# Altium PCB RPE_PCB.PcbDoc (part 2 of 2)
Units mm, origin at the board's own origin, x right, y up, seen from the top; angles counter-clockwise.
Board outline 86.99 x 60.07 mm, 4 copper layers (Top Layer, GND, Layer 2, Bottom Layer), stack 0.603 mm thick; 49 components, 31 nets, 149 pads, 32 vias.
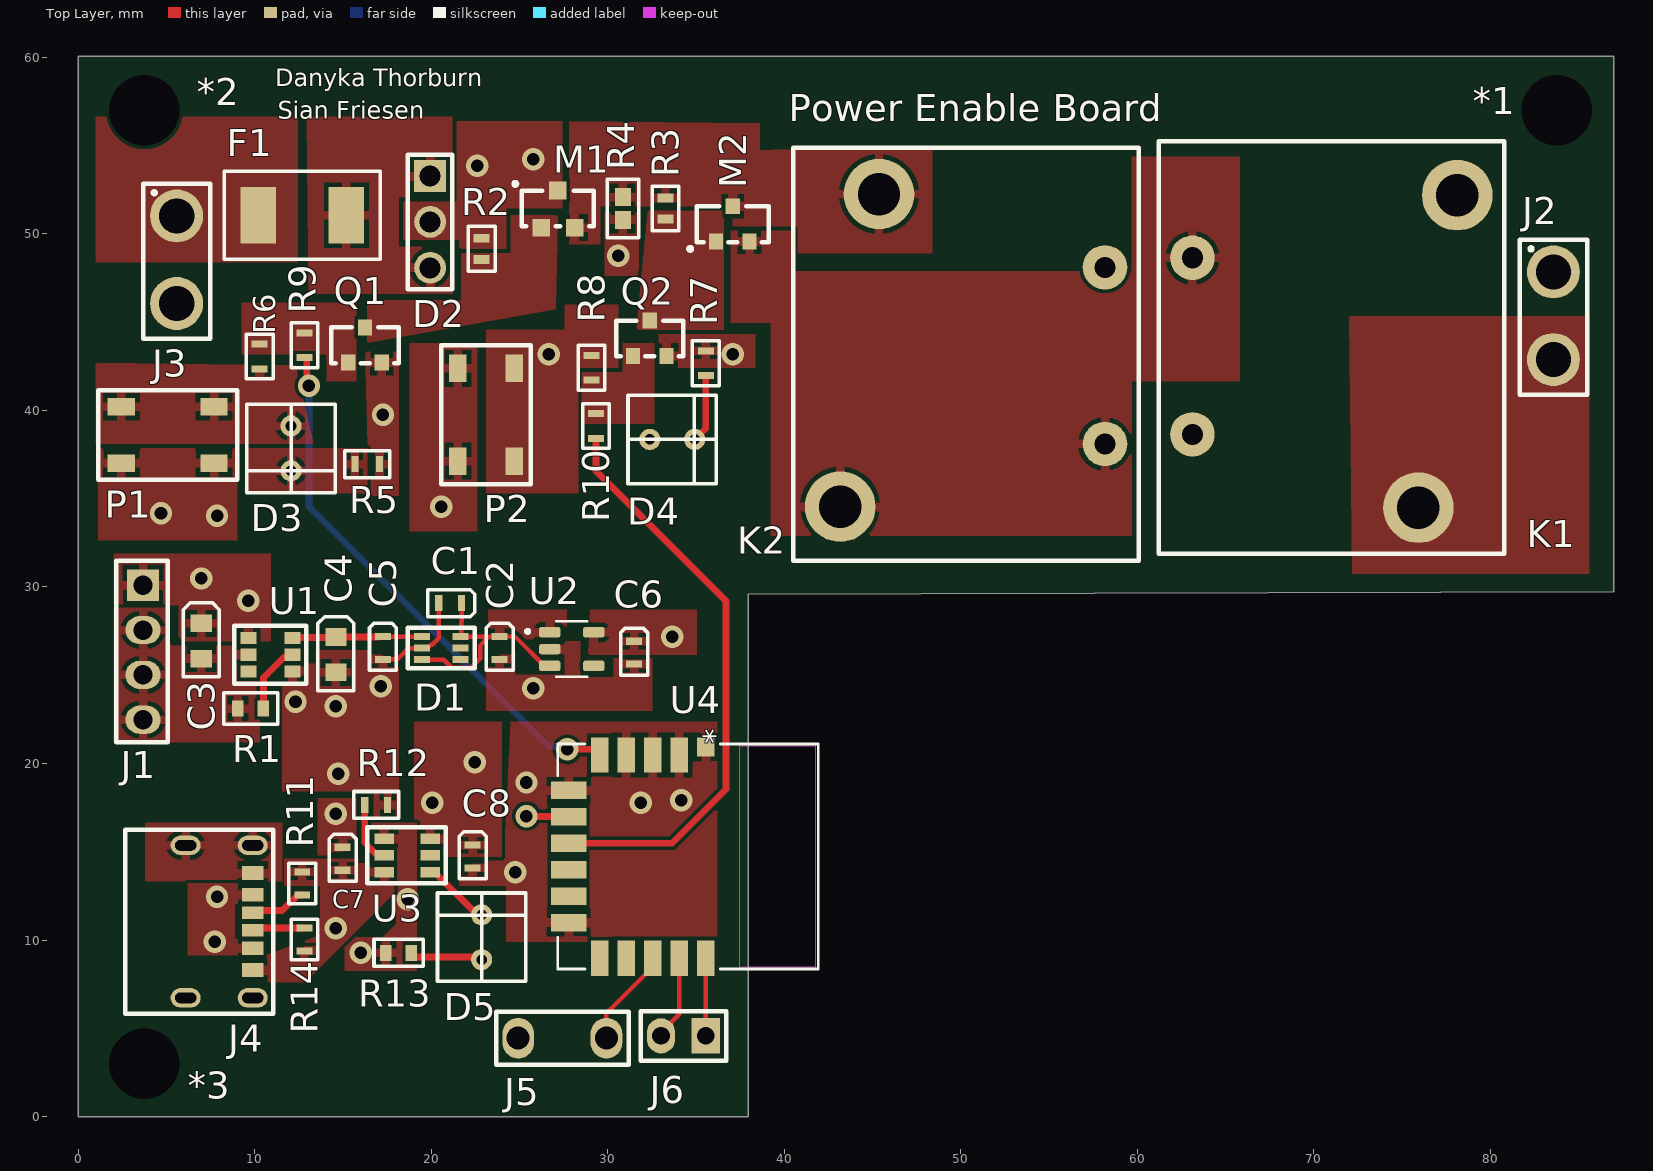
[diagram p0: Top Layer view]

## Via types
v1: diameter 1.27, hole 0.711, Top Layer to Bottom Layer, 32 vias

## Nets (pads, with @x,y where several pads share a name; then routed paths per layer and width w, separated by ;. In a path a pad name is that pad's centre, name@x,y a point inside that pad or via, vN(x,y) a via of type N, cw(c..) or ccw(c..) an arc to the next point about the centre after c; other vN are vias at no path point) (continued)
NetJ4_B5: J4.B5 R14.2 | length 2.9
  Top Layer w0.381: J4.B5@9.906,10.676 9.91,10.68 12.823,10.68 R14.2
NetJ5_1: J5.1 U4.J14 | length 5.6
  Top Layer w0.254: J5.1 29.932,5.86 32.545,8.473 U4.J14
NetJ6_1: J6.1 U4.J16 | length 4.4
  Top Layer w0.254: U4.J16 35.547,4.585 J6.1
NetJ6_2: J6.2 U4.J15 | length 5
  Top Layer w0.254: J6.2 33.02,4.772 34.046,5.798 U4.J15
  Top Layer w0.381: J6.2@32.898,4.694 J6.2
NetK1_3: K1.3 K2.1 K2.3 M2.S
NetK2_2: K2.2 M1.S M2.D R3.2 R4.2
NetM1_G: M1.G Q1.C R2.1
NetM2_G: M2.G Q2.C R3.1
NetQ1_B: Q1.B R6.2 R9.2
NetQ2_B: Q2.B R8.2 R10.2
NetR1_2: R1.2 U1.5 | length 3.9
  Top Layer w0.381: R1.2 10.504,24.855 11.651,26.002 11.992,26.002 U1.5
NetR9_1: R9.1 U4.J5 | length 30.9
  Top Layer w0.381: R9.1 12.945,42.988 12.954,42.979 12.954,41.529 v1(13.081,41.402) ; v1(27.71,20.803) 29.238,20.803 29.543,20.499 U4.J5
  Bottom Layer w0.381: v1(13.081,41.402) 13.081,34.54 26.645,20.977 27.128,20.977 27.131,20.974 27.54,20.974 v1(27.71,20.803)
NetR10_1: R10.1 U4.J8 | length 33.1
  Top Layer w0.381: U4.J8 33.644,15.483 36.703,18.542 36.703,29.21 29.337,36.576 R10.1
NetR12_2: R12.2 U3.4 | length 3.5
  Top Layer w0.381: R12.2 16.241,15.509 16.848,14.903 17.23,14.903 U3.4
pads on no net: *1.1 *2.1 *3.1 D1.4 D1.5 U1.3 U2.4 U3.1 U4.J9 U4.J10 U4.J12 U4.J13

## Polygon pours and split planes (outlines as drawn)
GND on Top Layer "GND_L01_P022" (solid, pour order 22): 11.557,25.654 13.462,25.654 13.462,26.416 18.161,26.416 18.161,23.241 11.557,23.241
+VBAT_3V7 on Top Layer "+VBAT_3V7_L01_P019" (solid, pour order 19): 2.032,31.877 10.922,31.877 10.922,26.924 5.969,26.924 5.715,27.178 5.715,28.956 2.159,28.956 2.032,29.083
GND on Top Layer "GND_L01_P018" (solid, pour order 18): 2.032,28.829 5.08,28.829 5.08,26.924 5.334,26.67 10.287,26.67 10.287,21.209 5.461,21.209 2.032,21.209
GND on Top Layer "GND_L01_P071" (solid, pour order 71): 29.845,51.181 31.75,51.181 31.75,47.752 31.623,47.625 29.845,47.625
NetK2_2 on Top Layer "NETK2_2_L01_P069" (solid, pour order 69): 27.813,56.381 27.813,51.562 34.671,51.562 38.608,51.562 38.608,56.261
GND on Top Layer "GND_L01_P075" (solid, pour order 75): 3.81,16.637 11.557,16.637 11.557,13.335 3.81,13.335
+5V on Top Layer "+5V_L01_P074" (solid, pour order 74): 6.223,13.208 10.922,13.208 10.922,12.065 8.89,12.065 8.89,10.033 10.541,10.033 10.541,9.144 6.223,9.144
GND on Top Layer "GND_L01_P013" (solid, pour order 13): 8.938,8.512 13.716,10.287 13.716,13.081 11.684,13.081 11.684,14.605 15.875,14.605 15.875,14.351 17.907,14.351 17.907,12.666 12.861,7.62 8.826,7.62
GND on Top Layer "GND_L01_P021" (solid, pour order 21): 24.511,22.352 36.195,22.352 36.195,9.906 24.257,9.906 24.257,13.081 21.59,13.081 21.59,14.478 24.13,14.478
GND on Top Layer "GND_L01_P073" (solid, pour order 73): 23.114,26.289 24.765,26.289 24.765,25.019 27.559,25.019 27.559,26.035 26.289,26.035 26.289,26.162 26.289,26.924 28.448,26.924 28.448,24.892 30.353,24.892 30.353,26.035 32.512,26.035 32.512,22.987 23.114,22.987
NetM2_G on Top Layer "NETM2_G_L01_P070" (solid, pour order 70): 32.258,51.308 36.576,51.308 36.576,44.577 31.623,44.577
NetK2_2 on Top Layer "NETK2_2_L01_P072" (solid, pour order 72): 27.813,51.562 27.813,49.403 29.591,49.403 29.591,51.562
GND on Top Layer "GND_L01_P066" (solid, pour order 66): 32.893,44.323 38.354,44.323 38.354,42.418 32.893,42.418
NetK1_3 on Top Layer "NETK1_3_L01_P064" (solid, pour order 64): 36.957,50.165 40.513,50.165 40.513,47.879 59.69,47.879 59.69,54.356 65.786,54.356 65.786,41.656 59.69,41.656 59.69,32.893 39.243,32.893 39.243,44.958 36.957,44.958
NetK2_2 on Top Layer "NETK2_2_L01_P063" (solid, pour order 63): 37.084,54.737 37.084,50.419 40.767,50.419 40.767,48.895 48.387,48.895 48.387,54.864
NetQ2_B on Top Layer "NETQ2_B_L01_P061" (solid, pour order 61): 28.448,42.164 30.861,42.164 30.861,43.815 32.639,43.815 32.639,39.243 28.448,39.243
NetM1_G on Top Layer "NETM1_G_L01_P056" (solid, pour order 56): 16.383,46.228 16.383,43.815 27.051,45.72 27.178,51.054 24.511,51.054 24.511,48.895 21.717,48.895 21.717,46.228
14V6 on Top Layer "14V6_L01_P055" (solid, pour order 55): 18.415,51.816 21.463,51.816 21.463,56.388 27.432,56.388 27.432,51.435 24.257,51.435 24.257,49.149 21.717,49.149 21.59,49.276 21.59,49.657 18.415,49.657
GND on Top Layer "GND_L01_P050" (solid, pour order 50): 16.264,43.307 18.161,43.307 18.161,35.179 16.51,35.179
NetQ1_B on Top Layer "NETQ1_B_L01_P037" (solid, pour order 37): 9.271,46.101 9.271,43.18 14.097,43.18 14.097,41.656 15.748,41.656 15.748,46.101
+5V on Top Layer "+5V_L01_P015" (solid, pour order 15): 13.589,18.034 15.748,18.034 15.748,14.732 13.589,14.732
3V3 on Top Layer "3V3_L01_P031" (solid, pour order 31): 29.026,28.702 35.052,28.702 35.052,26.162 28.899,26.162
NetC1_2 on Top Layer "NETC1_2_L01_P023" (solid, pour order 23): 23.241,28.702 27.686,28.702 27.686,27.051 23.241,27.051
NetJ2_2 on Top Layer "NETJ2_2_L01_P065" (solid, pour order 65): 72.009,45.339 85.598,45.339 85.598,30.734 72.158,30.734
NetD2_+ on Top Layer "NETD2_+_L01_P054" (solid, pour order 54): 12.954,56.642 21.209,56.642 21.209,52.07 18.161,52.07 18.161,49.276 21.209,49.276 21.209,46.609 13.081,46.609
NetD3_+ on Top Layer "NETD3_+_L01_P038" (solid, pour order 38): 1.016,42.702 12.319,42.545 13.335,38.1 1.016,38.1
NetD4_+ on Top Layer "NETD4_+_L01_P060" (solid, pour order 60): 23.114,44.577 27.559,44.577 27.559,45.974 30.607,45.974 30.607,42.418 28.321,42.418 28.321,35.306 23.114,35.306
3V3 on Top Layer "3V3_L01_P049" (solid, pour order 49): 18.796,43.815 22.606,43.815 22.606,33.147 18.796,33.147
3V3 on Top Layer "3V3_L01_P048" (solid, pour order 48): 1.143,37.846 9.017,37.846 9.017,32.639 1.143,32.639
NetD3_- on Top Layer "NETD3_-_L01_P039" (solid, pour order 39): 9.525,37.846 16.383,37.846 16.383,35.306 9.525,35.306
GND on Top Layer "GND_L01_P035" (solid, pour order 35): 11.557,23.241 18.161,23.241 18.161,16.891 16.764,16.891 16.764,18.415 11.557,18.415
+VBAT_3V7 on Top Layer "+VBAT_3V7_L01_P020" (solid, pour order 20): 19.05,22.352 24.003,22.352 24.003,14.732 19.05,14.732
+5V on Top Layer "+5V_L01_P014" (solid, pour order 14): 16.415,16.637 19.177,16.637 19.177,8.255 15.113,8.255 15.113,10.16 17.272,10.16 18.034,10.922 18.034,15.24 16.764,15.24
NetF1_2 on Top Layer "NETF1_2_L01_P000" (solid, pour order 0): 1.016,56.642 12.446,56.642 12.446,48.387 1.016,48.387
+5V on Layer 2 "+5V_L03_P017" (solid, pour order 17): 1.11,24.13 19.177,24.13 19.177,0.381 1.397,0.381 1.27,0.508
3V3 on Layer 2 "3V3_L03_P033" (solid, pour order 33): 2.667,39.116 36.957,39.116 36.957,14.097 24.257,14.097 24.257,32.258 2.667,32.258
14V6 on Layer 2 "14V6_L03_P068" (solid, pour order 68): 17.526,56.388 17.653,56.515 85.598,56.515 85.598,32.893 85.471,33.02 38.862,33.02 38.862,40.132 38.735,40.259 17.653,40.259
+VBAT_3V7 on Bottom Layer "+VBAT_3V7_L04_P034" (solid, pour order 34): 1.397,32.512 1.397,13.589 25.4,13.589 25.4,22.225 15.113,32.512
14V6 on Bottom Layer "14V6_L04_P026" (solid, pour order 26): 15.34,56.642 85.852,56.642 85.852,29.718 17.78,30.607
GND on GND "GND_L02_P016" (solid, pour order 16): 1.524,59.055 85.979,59.055 85.979,29.718 37.338,29.573 36.83,0.508 1.27,0.508

## Silkscreen, mask and mechanical layers (free items; w line width, h text height)
Top Overlay:
  text "Danyka Thorburn" at 11.176,58.372 h1
  text "Sian Friesen" at 11.303,56.515 h1
  text "Power Enable Board" at 40.259,56.388 h1.52

## Text inside footprints (layer, text, board x,y; h text height)
U4: Top Overlay "*" at 34.912,21.981 h1.27 r270; Mechanical 13 "*" at 34.912,19.619 h1.27 r270